# Altium PCB motor plate.PcbDoc
Units mm, origin at the board's own origin, x right, y up, seen from the top; angles counter-clockwise.
Board outline 60.2 x 60.07 mm, 2 copper layers (Top Layer, Bottom Layer); 17 components, 4 nets, 53 pads, 2 vias.
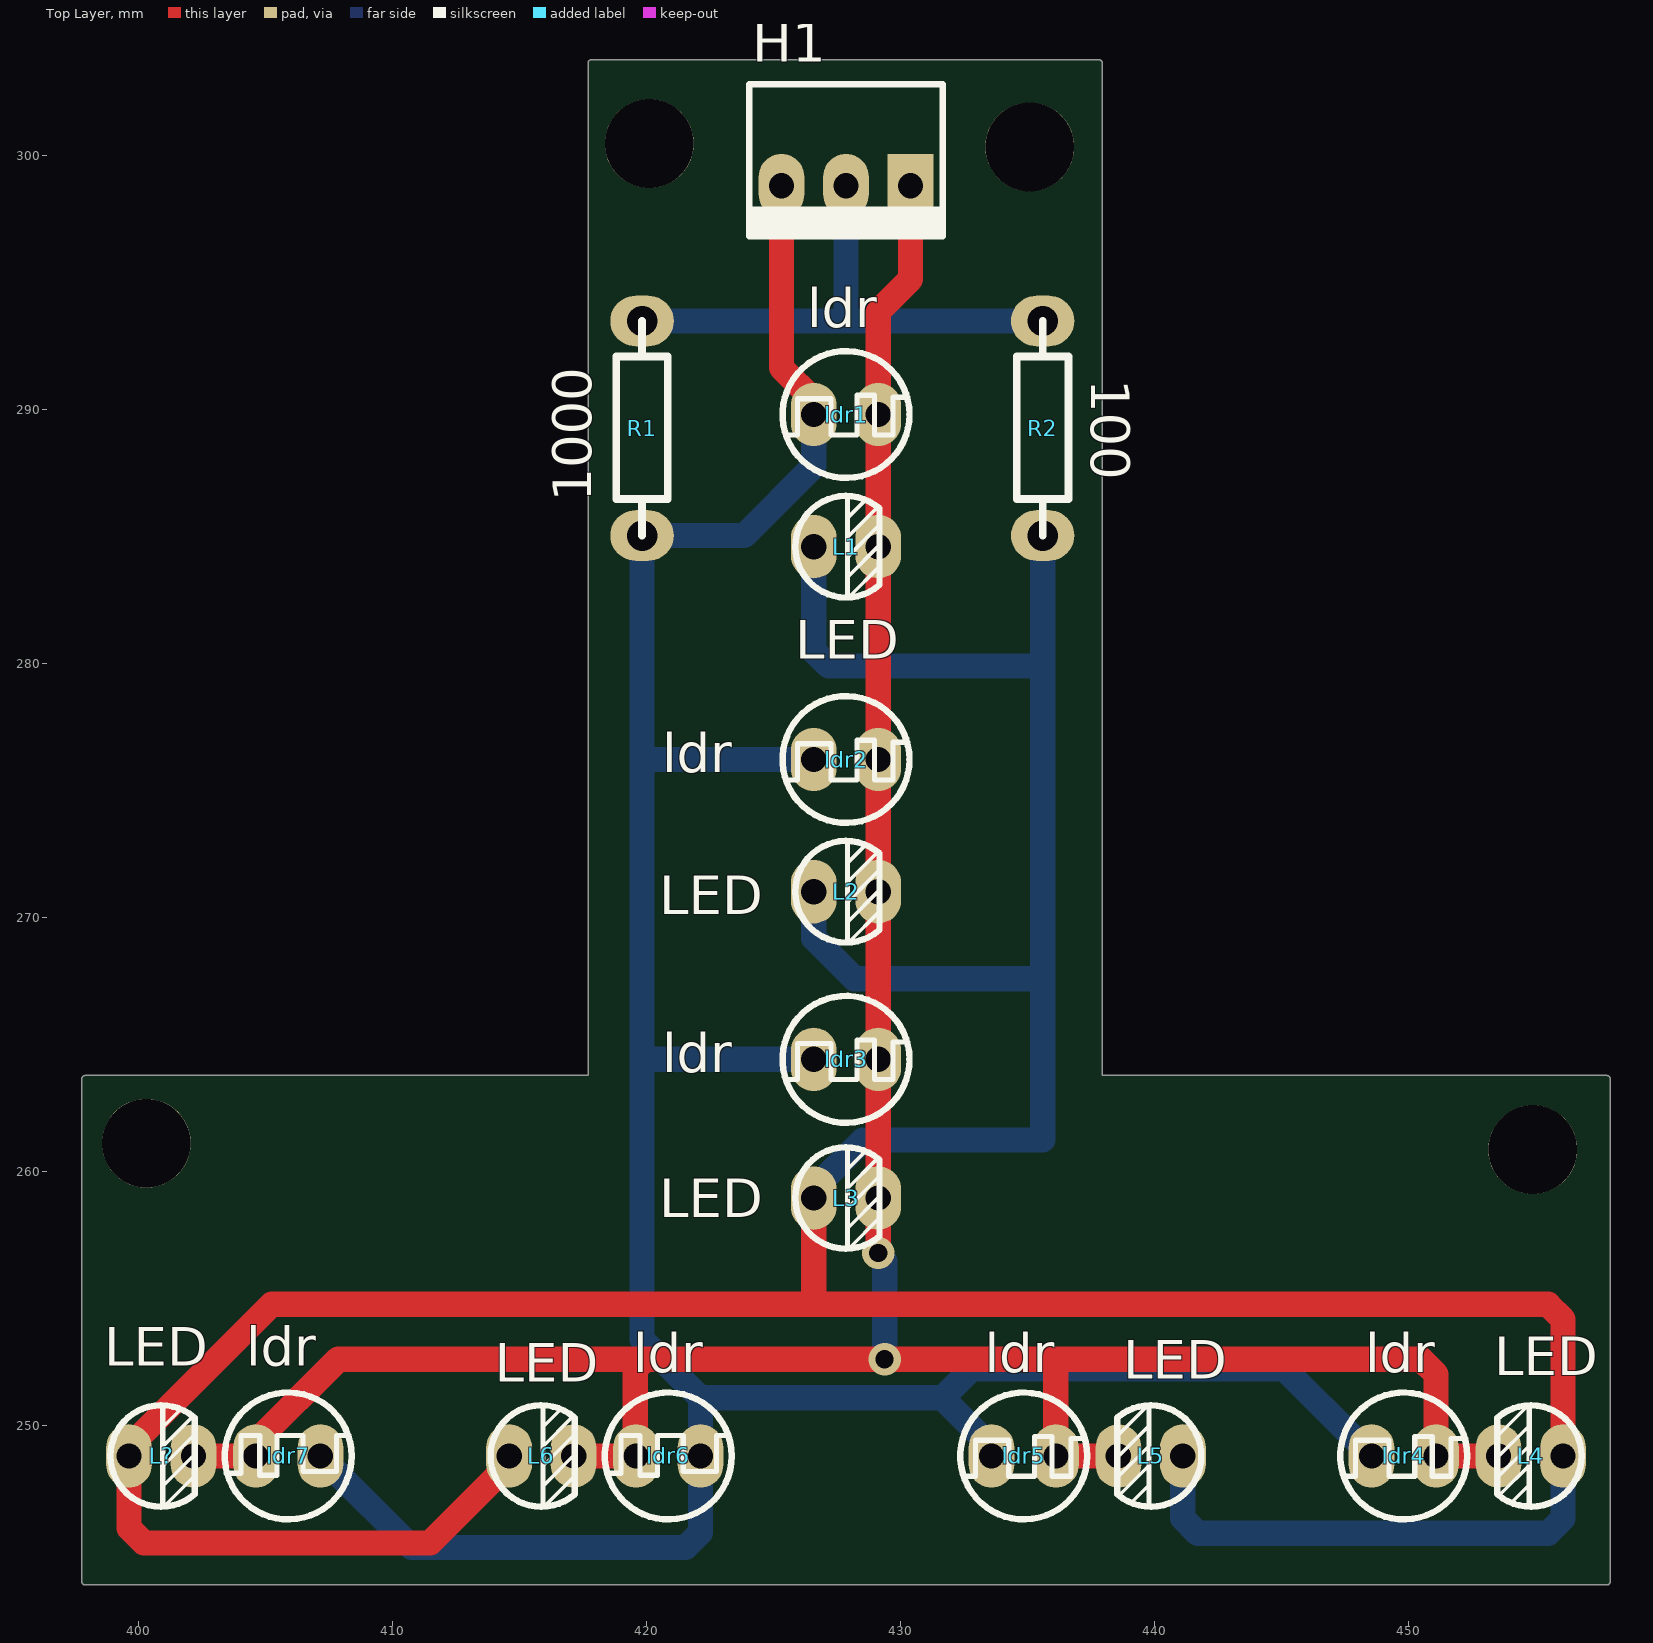
[diagram p0: Top Layer view]
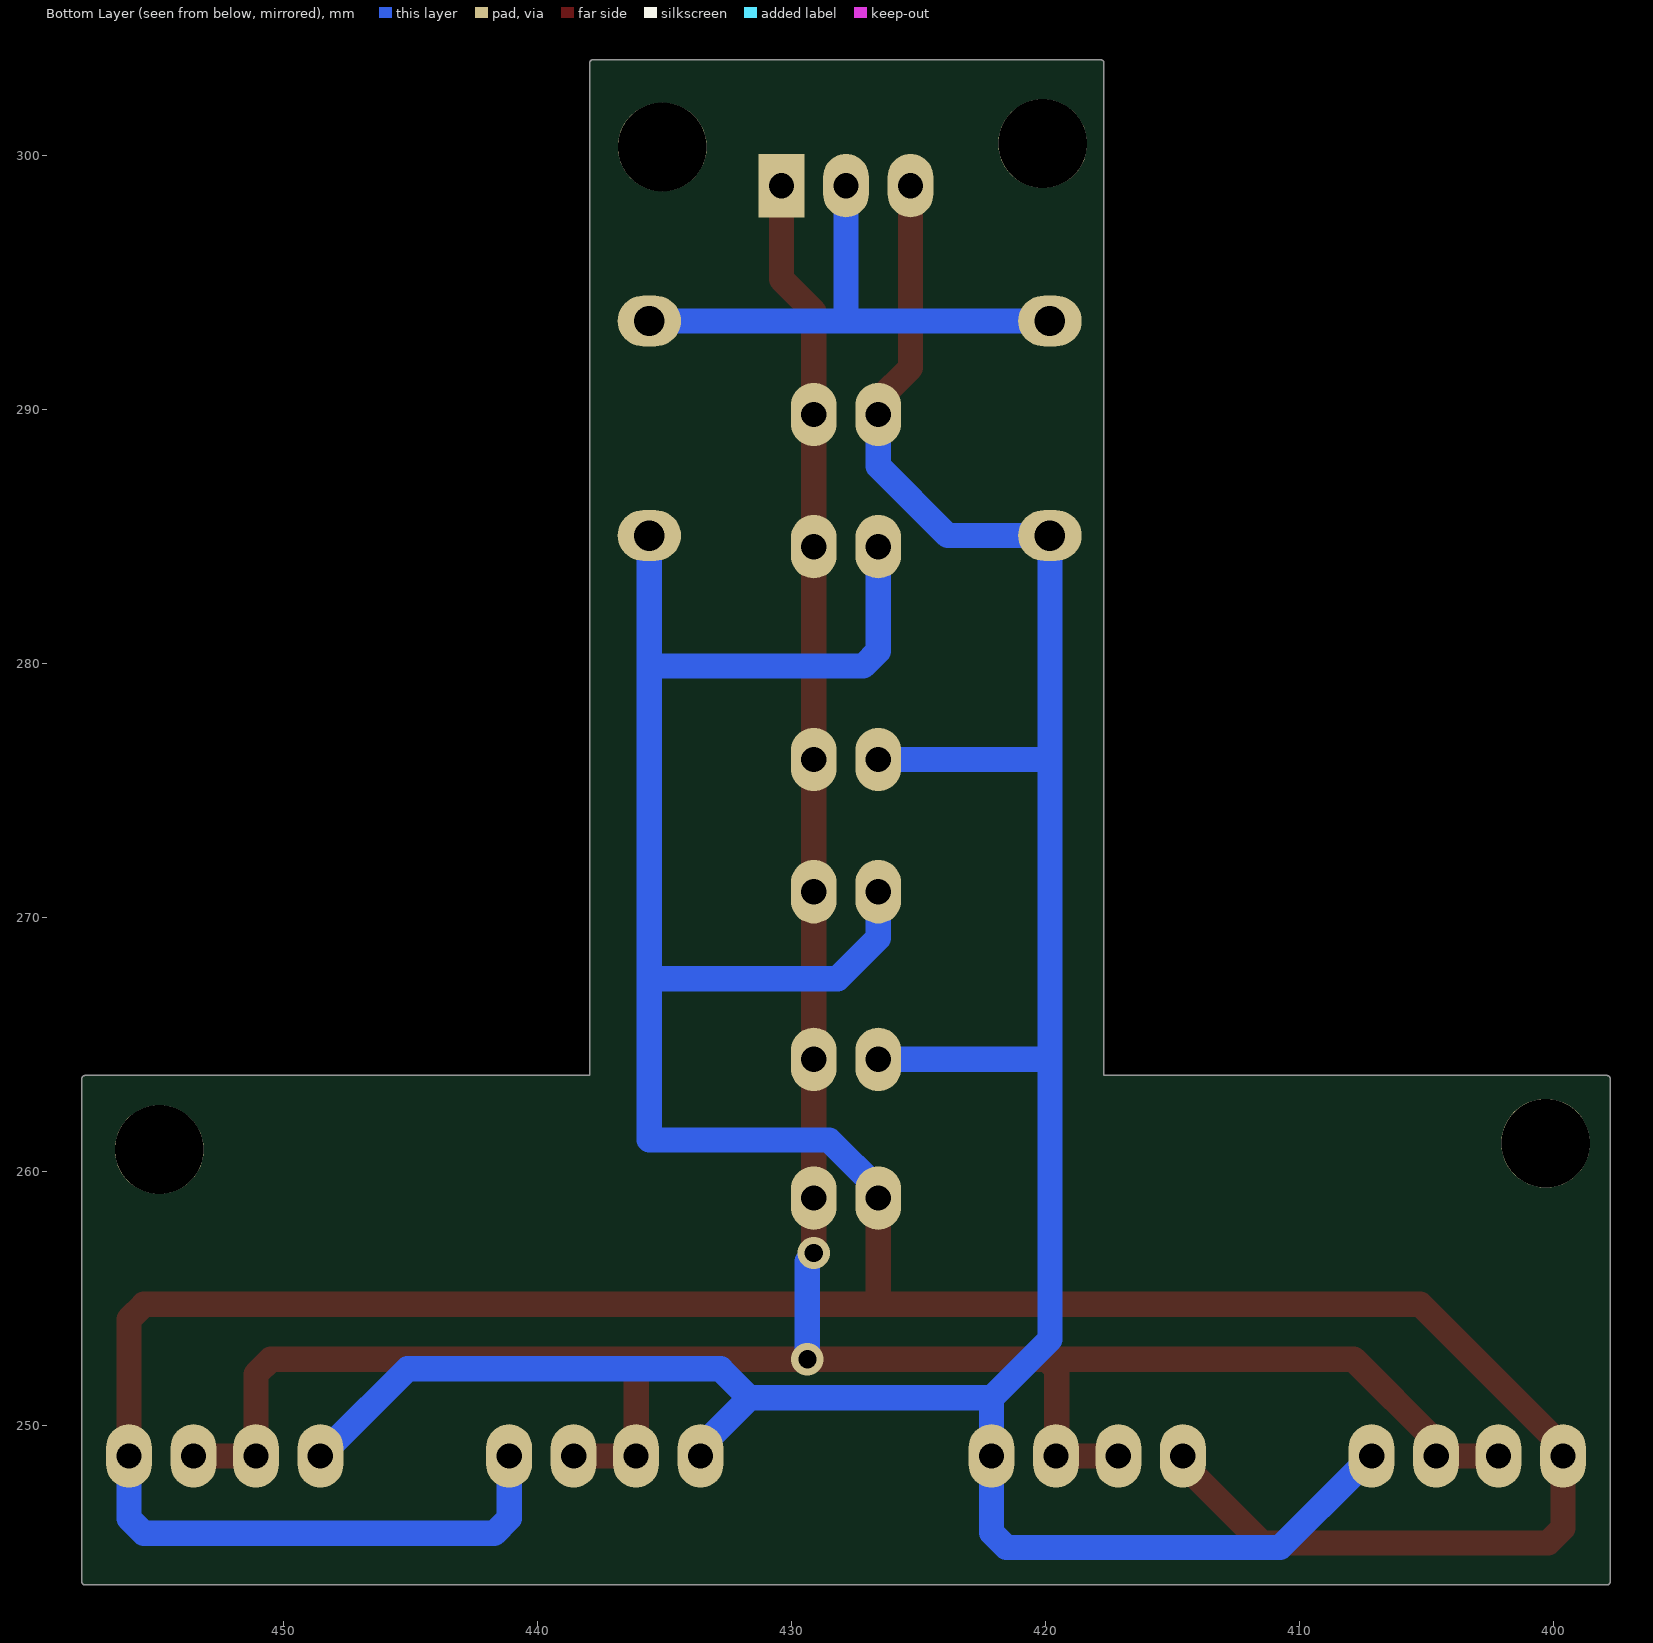
[diagram p1: Bottom Layer view, seen from below]
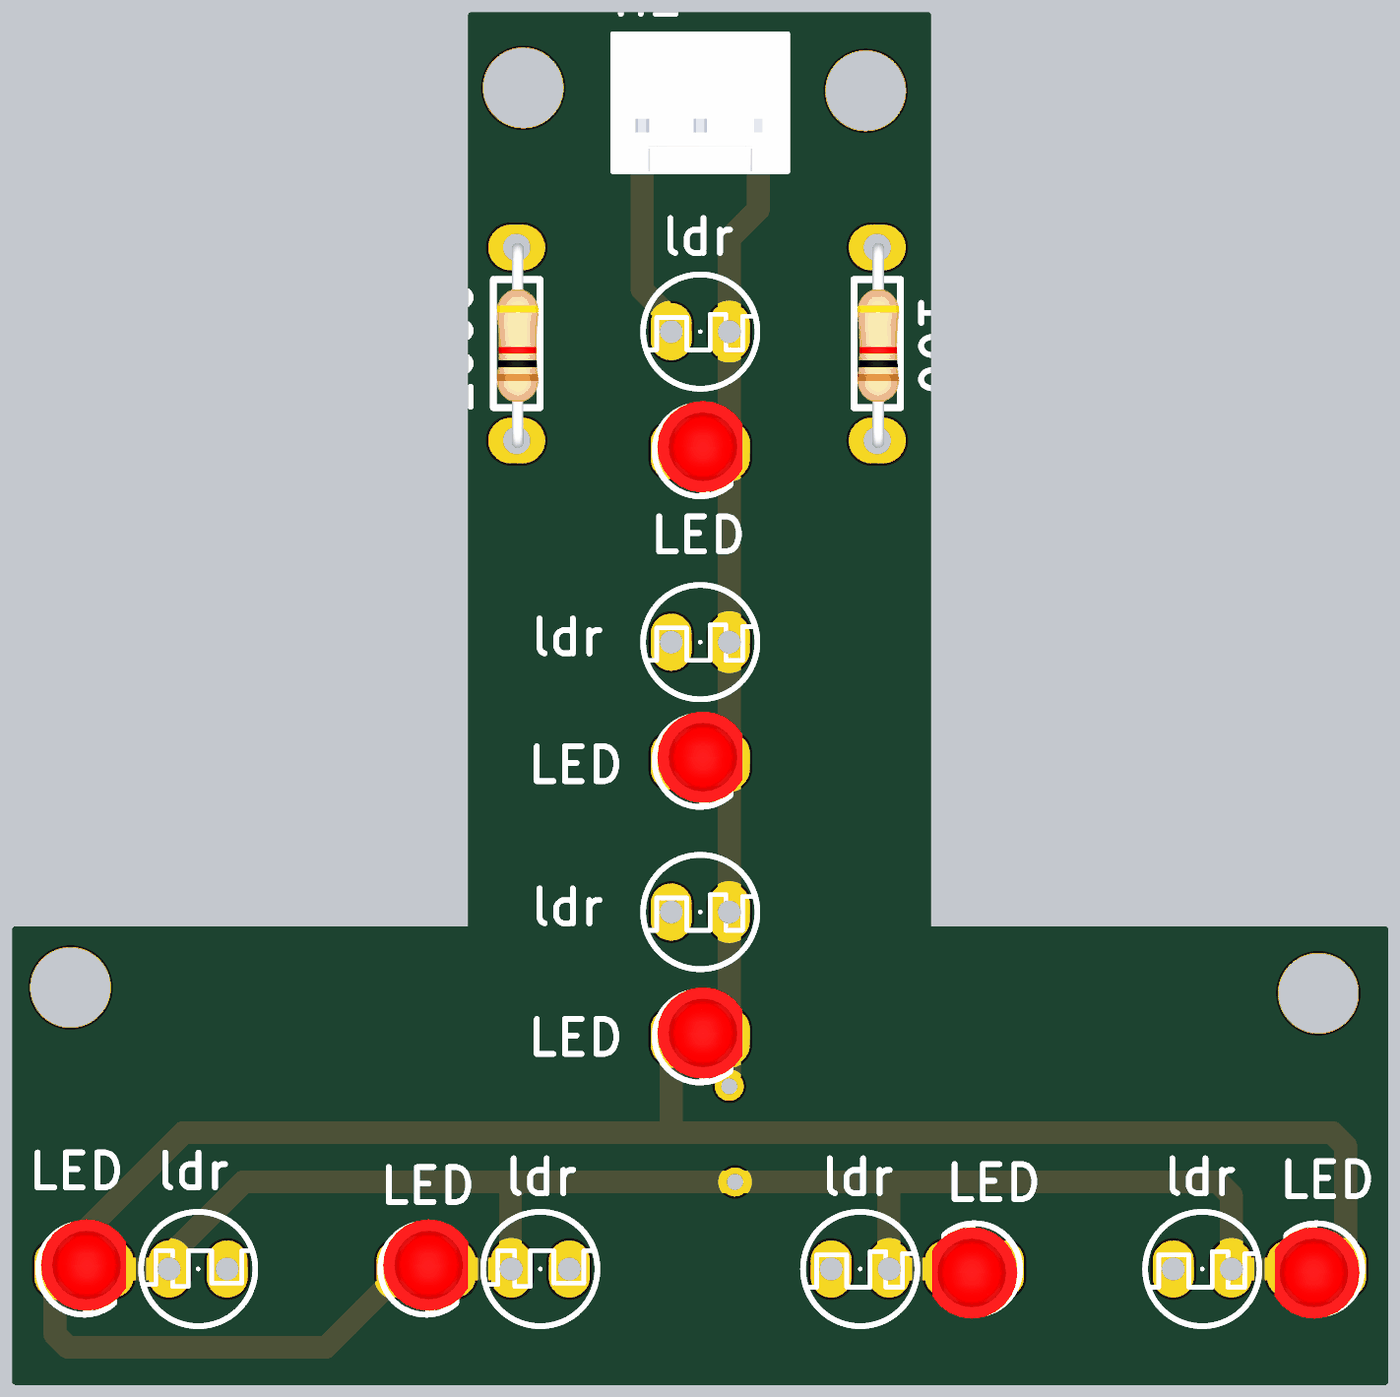
[diagram p2: 3D render of the assembled board from above, using the file's embedded part models]

## Layer stack, top to bottom
Top Solder: solder mask 0.0102, Solder Resist, Dk 3.5
Top Layer: signal copper 0.0356
Dielectric 1: dielectric 0.32, FR-4, Dk 4.8
Bottom Layer: signal copper 0.0356
Bottom Solder: solder mask 0.0102, Solder Resist, Dk 3.5

## Board outline
397.764,243.84 397.764,263.652 cw(c397.891,263.652) 397.891,263.779 417.702,263.779 417.702,303.657 cw(c417.83,303.657) 417.83,303.784 437.83,303.784 cw(c437.83,303.657) 437.957,303.657 437.957,263.779 457.835,263.779 cw(c457.835,263.652) 457.962,263.652 457.962,243.84 cw(c457.835,243.84) 457.835,243.713 397.891,243.713 cw(c397.891,243.84)

## Design rules (kind name [scope] priority, off if disabled: settings)
Clearance [All] p1: gap=0.254 ignorepadtopadclearanceinfootprint=FALSE except(0: Arc-Hole Track-Hole SMDPad-Hole THPad-Hole Via-Hole Fill-Hole Poly-Hole Region-Hole Text-Hole)
PolygonConnect [All] p1: connectstyle=Relief reliefconductorwidth=0.254 reliefentries=4 polygonreliefangle="90 Angle" airgapwidth=0.254
RoutingVias [All] p1: holewidth=0.711 width=1.27 viastyle="Through Hole" minholewidth=0.711 minwidth=1.27 maxholewidth=0.711 maxwidth=1.27
SolderMaskExpansion [All] p1: expansion=0.102 istentingtop=FALSE
SupplyNets "Schematic Supply Nets_2" [InNet('GND')] p1: voltage=0.000
SupplyNets "Schematic Supply Nets_1" [InNet('VCC')] p2: voltage=0.000
SupplyNets "Schematic Supply Nets" [InNet('out1')] p3: voltage=0.000
Width [All] p1: maxlimit=2 minlimit=0.5 preferedwidth=1
30 further rules are at their usual default settings.

## Classes and differential pairs
component class ldr: ldr LED

## Components (designator, comment, footprint, x,y, rotation, side; value= is the part's Value field where it differs from the comment)
H1 "Header 3" mokhaberati3 430.403,298.831 r180 top
L1 "LED" LED_3 427.863,284.607 r0 top
L2 "LED" LED_3 427.863,271.018 r0 top
L3 "LED" LED_3 427.863,258.953 r0 top
L4 "LED" LED_3 454.835,248.793 r180 top
L5 "LED" LED_3 439.863,248.793 r180 top
L6 "LED" LED_3 415.863,248.793 r0 top
L? "LED" LED_3 400.891,248.793 r0 top
ldr1 "ldr" ldr_1 427.863,289.814 r180 top
ldr2 "ldr" ldr_1 427.863,276.225 r180 top
ldr3 "ldr" ldr_1 427.863,264.414 r180 top
ldr4 "ldr" ldr_1 449.834,248.793 r180 top
ldr5 "ldr" ldr_1 434.863,248.793 r180 top
ldr6 "ldr" ldr_1 420.863,248.793 r0 top
ldr7 "ldr" ldr_1 405.891,248.793 r0 top
R1 "1000" res_1 419.83,289.272 r90 top
R2 "100" res_1 435.61,289.272 r90 top

## Footprints (in the part's own frame and the unit in brackets; to place one, negate y for a bottom-side part, rotate by r counter-clockwise, add the part's x,y. Pads: shape width x height; smd on the part's side, far side on the other; paste and mask are expansions set on the pad)
ldr_1 [mm]
  oval 1.8x2.5 hole 1 paste-2539.97 mask+0.102: 1(-1.27,0) 2(1.27,0)
  round 0.2 on Top Overlay: 2(0,0)
  silkscreen extent -2.5,-2.5 2.5,2.5
LED_3 [mm] "www.Pishnam.com"
  oval 1.8x2.5 hole 1: 1(-1.27,0) 2(1.27,0)
  round 0.3 on Top Overlay: 1(0,0)
  silkscreen extent -2,-2.01 1.38,2, body extent -1.88,-1.83 1.84,2.17, height 5.08
mokhaberati3 [mm]
  rect 1.8x2.5 hole 1: 1(0,0)
  oval 1.8x2.5 hole 1: 2(2.54,0) 3(5.08,0)
  silkscreen extent -1.27,-4 6.35,2, body extent -1.27,-4 6.35,2, height 11
res_1 [mm] "www.Pishnam.com"
  oval 2x2.5 hole 1.2: 1(-4.225,0) 2(4.225,0)
  silkscreen extent -4.22,-1.02 4.23,1.02, body extent -4.54,-0.96 4.42,0.88, height 1.92

## Part data
H1: "Header, 3-Pin", طراحی توسط="مهندس محمد رفیعی", وب سایت=www.Pishnam.com, کانال تلگرام=@Pishnam
R1 R2: library part Resistor, "Resistor", طراحی توسط="مهندس محمد رفیعی", وب سایت=www.Pishnam.com, کانال تلگرام=@Pishnam
L1 L2 L3 L4 L5 L6 L? ldr1 ldr2 ldr3 ldr4 ldr5 ldr6 ldr7: طراحی توسط="مهندس محمد رفیعی", وب سایت=www.Pishnam.com, کانال تلگرام=@Pishnam

## Free pads (board coordinates)
  round 3.5 hole 3.5: 6(400.304,261.112) 6(420.116,300.482) 6(435.102,300.355) 6(454.914,260.858)

## Via types
v1: diameter 1.27, hole 0.711, Top Layer to Bottom Layer, 2 vias

## Nets (pads, with @x,y where several pads share a name; then routed paths per layer and width w, separated by ;. In a path a pad name is that pad's centre, name@x,y a point inside that pad or via, vN(x,y) a via of type N, cw(c..) or ccw(c..) an arc to the next point about the centre after c; other vN are vias at no path point)
GND: H1.1 L1.2 L2.2 L3.2 L4.2 L5.2 L6.2 L?.2 ldr1.1 ldr2.1 ldr3.1 ldr4.1 ldr5.1 ldr6.1 ldr7.1 | length 116.4
  Top Layer w1: L?.2 ldr7.1 404.621,249.359 407.865,252.603 419.691,252.603 419.564,252.476 419.564,252.222 ; L6.2 419.564,248.793 ldr6.1 ; ldr6.1@419.564,248.822 419.564,252.222 ; v1(429.133,256.786) L2.2 ldr2.1 L1.2 ldr1.1 429.133,293.872 430.403,295.142 H1.1 ; ldr5.1@436.118,248.808 436.118,252.476 435.991,252.603 v1(429.387,252.603) 419.945,252.603 419.564,252.222 ; 436.118,252.603 450.518,252.603 451.104,252.017 ldr4.1 L4.2 ; ldr5.1 L5.2
  Bottom Layer w1: v1(429.133,256.786) 429.133,256.713 429.387,256.459 v1(429.387,252.603)
NetL1_1: L1.1@426.593,284.607 L2.1@426.593,271.018 L3.1@426.593,258.953 L4.1@456.105,248.793 L5.1@441.133,248.793 L6.1@414.593,248.793 L?.1@399.621,248.793 R2.1 | length 167.9
  Top Layer w1: L6.1@414.593,248.793 414.593,248.477 411.48,245.364 400.207,245.364 399.621,245.95 399.621,248.793 399.621,249.143 405.24,254.762 426.593,254.762 ; L3.1@426.593,258.953 426.593,254.762 ; L4.1@456.105,248.793 456.105,254.176 455.519,254.762 426.593,254.762
  Bottom Layer w1: L3.1@426.593,258.953 426.593,259.303 428.529,261.239 435.61,261.239 435.61,267.589 ; L2.1@426.593,271.018 426.593,269.191 428.195,267.589 435.61,267.589 ; L1.1@426.593,284.607 426.593,280.494 427.179,279.908 435.61,279.908 ; R2.1 435.61,279.908 ; L5.1@441.133,248.793 441.133,246.331 441.719,245.745 455.519,245.745 456.105,246.331 L4.1@456.105,248.793 ; 435.61,267.589 435.61,279.908
out1: H1.3 ldr1.2@426.593,289.814 ldr2.2@426.593,276.225 ldr3.2@426.593,264.414 ldr4.2@448.564,248.793 ldr5.2@433.593,248.793 ldr6.2@422.133,248.793 ldr7.2@407.161,248.793 R1.1 | length 121.6
  Top Layer w1: H1.3 425.323,291.65 426.593,290.38 ldr1.2@426.593,289.814
  Bottom Layer w1: ldr7.2@407.161,248.793 407.161,248.659 407.531,248.29 407.664,248.29 410.766,245.188 421.547,245.188 422.133,245.774 422.133,248.793 422.133,251.079 ; ldr3.2@426.593,264.414 420.116,264.414 419.83,264.7 ; ldr2.2@426.593,276.225 419.83,276.225 ; ldr1.2@426.593,289.814 426.593,287.782 423.858,285.047 R1.1 419.83,276.225 ; ldr5.2@433.593,248.793 433.593,249.143 431.657,251.079 ; ldr4.2@448.564,248.793 448.564,248.927 448.194,249.296 448.061,249.296 445.135,252.222 432.8,252.222 431.657,251.079 ; 419.83,264.7 419.83,253.382 422.133,251.079 ; 419.83,264.7 419.83,276.225 ; 422.133,251.079 431.657,251.079
VCC: H1.2 R1.2 R2.2 | length 21.1
  Bottom Layer w1: R1.2 427.863,293.497 ; H1.2 427.863,293.497 ; R2.2 427.863,293.497
pads on no net: L1.1@427.863,284.607 L2.1@427.863,271.018 L3.1@427.863,258.953 L4.1@454.835,248.793 L5.1@439.863,248.793 L6.1@415.863,248.793 L?.1@400.891,248.793 ldr1.2@427.863,289.814 ldr2.2@427.863,276.225 ldr3.2@427.863,264.414 ldr4.2@449.834,248.793 ldr5.2@434.863,248.793 ldr6.2@420.863,248.793 ldr7.2@405.891,248.793

## Silkscreen, mask and mechanical layers (free items; w line width, h text height)
Mechanical 1:
  lines w0.254: 397.891,243.84 457.835,243.84 457.835,263.652 437.83,263.652 437.83,303.657 417.83,303.657 417.83,263.652 397.891,263.652 397.891,243.84